# Altium PCB PCB3.PcbDoc
Units mm, origin at the board's own origin, x right, y up, seen from the top; angles counter-clockwise.
Board outline 77.99 x 46.99 mm, 2 copper layers (Top Layer, Bottom Layer); 98 components, 79 nets, 520 pads, 0 vias.
Unrouted connection lines stored in the file: 213.
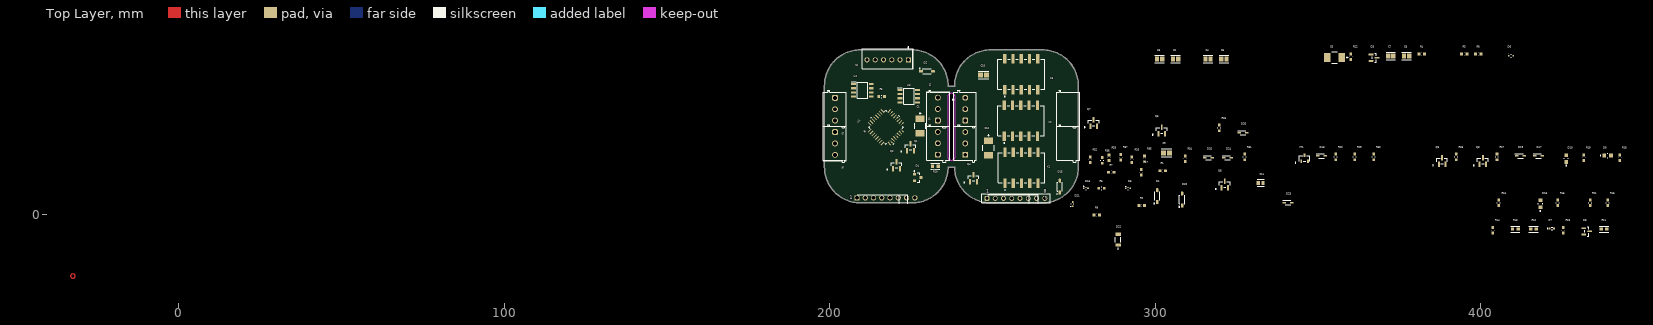
[diagram p0: Top Layer view]
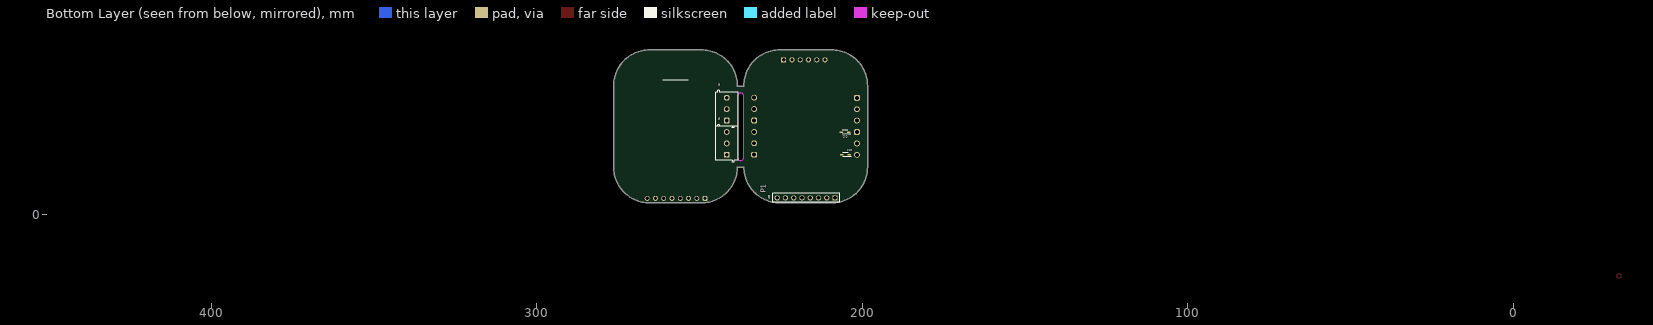
[diagram p1: Bottom Layer view, seen from below]

## Layer stack, top to bottom
Top Solder: solder mask 0.0102, Solder Resist, Dk 3.5
Top Layer: signal copper 0.0356
Dielectric 1: dielectric 0.32, FR-4, Dk 4.8
Bottom Layer: signal copper 0.0356
Bottom Solder: solder mask 0.0102, Solder Resist, Dk 3.5

## Board outline
198.35,14.624 ccw(c209.343,14.624) 209.356,3.631 225.343,3.631 ccw(c225.343,14.624) 236.336,14.624 ccw(c236.33,14.625) 236.336,14.625 cw(c236.343,14.625) 236.343,14.632 238.343,14.632 cw(c238.343,14.625) 238.35,14.625 cw(c238.343,14.625) 238.35,14.625 cw(c238.342,14.624) 238.35,14.624 ccw(c249.343,14.624) 249.356,3.631 265.343,3.631 ccw(c265.343,14.624) 276.336,14.624 ccw(c276.33,14.625) 276.336,14.625 276.334,39.385 cw(c276.343,39.385) 276.334,39.386 276.333,39.865 ccw(c265.343,39.624) 265.351,50.618 cw(c265.345,50.62) 265.345,50.613 249.341,50.613 cw(c249.341,50.62) 249.334,50.618 ccw(c249.345,39.62) 238.35,39.386 cw(c238.343,39.385) 238.343,39.379 236.34,39.379 cw(c236.34,39.385) 236.334,39.385 cw(c236.34,39.385) 236.334,39.386 ccw(c225.352,39.624) 236.336,39.624 ccw(c225.343,39.624) 225.343,50.618 209.339,50.618 cw(c209.344,47.466) 209.347,50.618 209.339,50.618 ccw(c209.343,39.624) 198.35,39.619
cut-out: 236.343,17.626 236.343,36.385 cw(c237.343,36.385) 238.343,36.398 238.343,36.4 238.343,17.625 cw(c237.343,17.625)

## Design rules (kind name [scope] priority, off if disabled: settings)
Clearance [All] p1: gap=0.254 ignorepadtopadclearanceinfootprint=FALSE except(0: Arc-Hole Track-Hole SMDPad-Hole THPad-Hole Via-Hole Fill-Hole Poly-Hole Region-Hole Text-Hole)
ComponentClearance [All] p1: gap=-4.826 collisioncheckmode=3 verticalgap=0.254 showdistances=FALSE
PolygonConnect [All] p1: connectstyle=Relief reliefconductorwidth=0.254 reliefentries=4 polygonreliefangle="90 Angle" airgapwidth=0.254
RoomDefinition Main_board [InComponentClass('Main_board')] p1: confinementstyle=ConfineIn formatcopy=TRUE lockcomponents=FALSE outline 150.496,-19.226 905.887,-19.226 905.887,73.594 150.496,73.594
RoutingCorners [All] p1: cornerstyle=Round minsetback=1.27 maxsetback=1.27
RoutingVias [All] p1: holewidth=0.457 width=0.635 viastyle="Through Hole" minholewidth=0.2 minwidth=0.2 maxholewidth=0.381 maxwidth=0.762
SolderMaskExpansion [All] p1: expansion=0.102 istentingtop=FALSE
UnRoutedNet [All] p1: checkbadconnections=TRUE
Width [All] p1: maxlimit=1 minlimit=0.254 preferedwidth=0.5 minimp=50.000000 maximp=50.000000 favimp=50.000000
27 further rules are at their usual default settings.

## Components (designator, comment, footprint, x,y, rotation, side; value= is the part's Value field where it differs from the comment)
C1 "TAJC476M016RNJ" FP-TAJC-MFG 227.711,27.254 r90 top
C2 "C0805C224K5RACTU" KEMET_C0805C-DN_IPC_B 306.208,47.793 r0 top
C3 "C0805C224K5RACTU" KEMET_C0805C-DN_IPC_B 301.331,47.793 r0 top
C4 "C0805C224K5RACTU" KEMET_C0805C-DN_IPC_B 316.164,47.793 r0 top
C5 "C0805C224K5RACTU" KEMET_C0805C-DN_IPC_B 321.041,47.793 r0 top
C6 "TAJC476M016RNJ" FP-TAJC-MFG 355.026,48.275 r0 top
C7 "C0805C224K5RACTU" KEMET_C0805C-DN_IPC_B 372.298,48.758 r0 top
C8 "C0805C224K5RACTU" KEMET_C0805C-DN_IPC_B 377.175,48.758 r0 top
C9 "0.1мк" KEMET_C0805C-DN_IPC_A 303.44,18.999 r0 top
C10 "0.1мк" KEMET_C0805C-DN_IPC_A 247.167,42.875 r0 top
C11 "1мк" KEMET_C0805C-DN_MFG 332.346,9.728 r0 top
C12 "TAJC476M016RNJ" FP-TAJC-MFG 248.742,20.487 r90 top
D1 "1N4148W-TP" FP-SOD-123-IPC_A 300.569,5.705 r90 top
D2 "1N4148W-TP" FP-SOD-123-IPC_A 229.845,44.018 r0 top
D3 "BAT54С" On_Semiconductor_318-08_IPC_B 367.193,48.199 r0 top
D4 "MMBZ12VALT1G" ONSC-SOT-23-3-318-08_V 226.974,11.405 r0 top
D5 "ESD5Z3.3T1G" ONSC-SOD-523-2-502-01_V 291.603,8.092 r0 top
D6 "ESD5Z3.3T1G" ONSC-SOD-523-2-502-01_V 409.23,48.809 r0 top
D7 "Diode 1N4148" 1N4148WT7 421.803,-4.277 r0 top
D8 "BAT54ALT1G" On_Semiconductor_318-08_IPC_B 432.496,-5.116 r0 top
D9 "150080SS75000" Wurth_Electronics_0_MFG 438.897,18.151 r0 top
D10 "150080SS75000" LED_GREEN 426.197,17.236 r90 top
D11 "Diode 1N4148" SOD2513X120N 205.054,18.39 r0 bottom
D12 "Diode 1N4148" SOD2513X120N 205.232,25.324 r0 bottom
D13 "Diode 1N4148" SOD2513X120N 351.089,18.049 r0 top
D15 "1N4148W-TP" FP-SOD-123-IPC_A 270.662,8.611 r90 top
D16 "ESD5Z3.3T1G" ONSC-SOD-523-2-502-01_V 278.649,8.092 r0 top
D17 "Diode 1N4148" SOD2513X120N 417.714,18.049 r0 top
D18 "150080SS75000" Wurth_Electronics_0_MFG 418.247,3.317 r90 top
D19 "Diode 1N4148" SOD2513X120N 412.126,18.049 r0 top
D20 "1N4148W-TP" FP-SOD-123-IPC_A 308.204,4.674 r90 top
D21 "ESD5Z3.3T1G" ONSC-SOD-523-2-502-01_V 274.599,3.225 r90 top
D22 "BZV55-C5V1,115" FP-SOD80C-MFG 288.544,-7.697 r90 top
D23 "Diode 1N4148" SOD2513X120N 340.766,3.708 r0 top
D24 "Diode 1N4148" SOD2513X120N 322.21,17.49 r0 top
D25 "Diode 1N4148" SOD2513X120N 316.368,17.49 r0 top
D26 "Diode 1N4148" SOD2513X120N 326.949,25.146 r0 top
J1 "691103110003" 691103110003 233.274,21.92 r90 top
J2 "691103110003" 691103110003 233.272,32.436 r90 top
J3 "691103110003" 691103110003 201.5,32.385 r270 top
J4 "61300811821" 61300811821 257.15,5.004 r0 top
J5 "SWR25X-NRTC-S06-ST-BA" Sullins_SWR25X-NRTC-S06-ST-BA_MFG 217.754,47.849 r180 top
J6 "691103110003" 691103110003 201.5,21.869 r270 top
J8 "691103110003" 691103110003 241.503,21.895 r90 bottom
J9 "691103110003" 691103110003 241.505,32.405 r90 bottom
K1 "TQ2SA-L2-5V-Z" FP-TQ2SA-L2-5V-Z-MFG 258.851,14.402 r0 top
K2 "TQ2SA-L2-5V-Z" FP-TQ2SA-L2-5V-Z-MFG 258.674,28.829 r0 top
K3 "TQ2SA-L2-5V-Z" FP-TQ2SA-L2-5V-Z-MFG 258.801,43.104 r0 top
P1 "61300811121" 61300811121 217.221,5.156 r0 bottom
Q1 "BC847C" SOT23-3_ONS-M 224.765,20.701 r0 top
Q2 "BC847C" SOT23-3_ONS-M 220.472,15.164 r0 top
Q3 "BC847C" SOT23-3_ONS-M 400.594,16.474 r0 top
Q4 "BC847C" SOT23-3_ONS-M 244.119,11.188 r0 top
Q5 "BC847C" SOT23-3_ONS-M 301.955,25.894 r0 top
Q6 "BC847C" SOT23-3_ONS-M 388.072,16.474 r0 top
Q7 "BC847C" SOT23-3_ONS-M 281.051,28.155 r0 top
Q8 "BC847C" SOT23-3_ONS-M 321.31,9.232 r0 top
R1 "100K" FP-RC0603-0_55-MFG 302.299,13.538 r0 top
R2 "100K" FP-RC0603-0_55-MFG 295.783,2.819 r0 top
R3 "470" FP-RC0603-0_55-MFG 394.854,49.342 r0 top
R4 "10K" FP-RC0603-0_55-MFG 381.773,49.342 r0 top
R5 "10K" FP-RC0603-0_55-MFG 215.875,36.297 r0 top
R6 "100K" FP-RC0603-0_55-MFG 283.449,8.143 r0 top
R7 "100K" FP-RC0603-0_55-MFG 286.399,13.03 r0 top
R8 "1M" FP-RC0603-0_55-MFG 399.172,49.342 r0 top
R9 "1M" FP-RC0603-0_55-MFG 281.94,-0.102 r0 top
R10 "620K" FP-RC0603-0_55-IPC_A 232.41,14.834 r0 top
R11 "620K" FP-RC0603-0_55-IPC_A 437.805,-4.43 r0 top
R12 "100K" FP-RC0603-0_55-IPC_A 416.164,-4.43 r0 top
R13 "100K" FP-RC0603-0_55-IPC_A 410.576,-4.43 r0 top
R14 "30K" FP-RC0603-0_55-MFG 403.617,-4.836 r90 top
R15 "1K5" FP-RC0603-0_55-MFG 423.606,3.597 r90 top
R16 "10K" FP-RC0603-0_55-MFG 438.897,3.597 r90 top
R17 "1K" FP-RC0603-0_55-MFG 295.717,13.071 r90 top
R18 "200" FP-RC0603-0_55-MFG 442.606,17.516 r90 top
R19 "200" FP-RC0603-0_55-MFG 431.557,17.516 r90 top
R20 "10K" FP-RC0603-0_55-MFG 355.357,17.719 r90 top
R21 "10K" FP-RC0603-0_55-MFG 433.563,3.597 r90 top
R22 "1M" FP-RC0603-0_55-MFG 359.979,48.478 r90 top
R23 "100K" FP-RC0603-0_55-MFG 425.283,-4.836 r90 top
R24 "100" FP-RC0603-0_55-MFG 405.496,3.597 r90 top
R25 "10K" FP-RC0603-0_55-MFG 319.608,26.631 r90 top
R26 "10K" FP-RC0603-0_55-MFG 292.786,16.84 r90 top
R27 "10K" FP-RC0603-0_55-MFG 404.937,17.719 r90 top
R28 "10K" FP-RC0603-0_55-MFG 392.39,17.719 r90 top
R29 "100K" FP-RC0603-0_55-MFG 361.199,17.719 r90 top
R30 "100K" FP-RC0603-0_55-MFG 367.041,17.719 r90 top
R31 "1K" FP-RC0603-0_55-MFG 327.467,17.719 r90 top
R32 "100K" FP-RC0603-0_55-MFG 279.959,16.852 r90 top
R33 "100K" FP-RC0603-0_55-MFG 285.75,17.487 r90 top
R34 "10K" FP-RC0603-0_55-MFG 309.179,17.16 r90 top
R35 "10K" FP-RC0603-0_55-MFG 296.657,17.16 r90 top
R36 "100K" FP-RC0603-0_55-MFG 283.718,16.649 r90 top
R37 "100K" FP-RC0603-0_55-MFG 289.306,17.614 r90 top
U1 "STM32L031K6T6" LQFP32_7X7X1P4 217.221,26.848 r45 top
U2 "LP2951CM-3.0/NOPB" SOIC127P600X175-8N 210.007,38.202 r0 top
U3 "IRF9362" SOIC127P600X175-8N 224.257,36.398 r0 top
VT1 "BC847" SOT23-3_ONS-L 345.832,17.287 r0 top

## Footprints (in the part's own frame and the unit in brackets; to place one, negate y for a bottom-side part, rotate by r counter-clockwise, add the part's x,y. Pads: shape width x height; smd on the part's side, far side on the other; paste and mask are expansions set on the pad)
1N4148WT7 [mm]
  rect 0.6x0.7 smd: 1(-0.7,0) 2(0.7,0)
  silkscreen extent -1.5,-0.4 0.2,0.4, body extent -0.85,-0.45 0.85,0.45, height 0.7
61300811121 [mm] "Pin Header, pitch 2.54 mm, THT, Vertical, single row, 8p"
  rect 1.6x1.6 hole 1.1: 1(-8.89,0)
  round 1.6 hole 1.1: 2(-6.35,0) 3(-3.81,0) 4(-1.27,0) 5(1.27,0) 6(3.81,0) 7(6.35,0) 8(8.89,0)
  silkscreen extent -10.31,-1.35 10.31,1.35, body extent -10.16,-1.27 10.16,1.27, height 8.57
61300811821 [mm] "Socket Header, Pitch 2.54 mm, THT, Vertical, single row, 8p"
  rrect50% 1.52x1.52 hole 1.02: 1(-8.89,0)
  round 1.52 hole 1.02: 2(-6.35,0) 3(-3.81,0) 4(-1.27,0) 5(1.27,0) 6(3.81,0) 7(6.35,0) 8(8.89,0)
  silkscreen extent -10.54,-1.35 10.54,1.35, body extent -10.41,-1.25 10.41,1.25, height 8.55
691103110003 [mm] "3,50mm - modular - blue - Horizontal wire entry - Pressure clamp - 8,4mm height - 03p"
  rrect50% 1.8x1.8 hole 1.2: 1(-3.5,0.1)
  round 1.8 hole 1.2: 2(0,0.1) 3(3.5,0.1)
  silkscreen extent -5.75,-3.5 5.75,3.5, body extent -5.75,-3.5 5.75,3.5, height 8.45
FP-RC0603-0_55-IPC_A [mm]
  rect 1.059x1.012 smd paste+0 mask+0: 1(-0.877,0) 2(0.877,0)
  silkscreen extent -1.41,-0.91 1.41,0.91, body extent -1.91,-1.01 1.91,1.01, height 0.25
FP-RC0603-0_55-MFG [mm]
  rect 0.9x0.8 smd paste+0 mask+0: 1(-0.85,0) 2(0.85,0)
  silkscreen extent -0.03,-0.45 0.03,0.45, body extent -1.4,-0.55 1.4,0.55, height 0.25
FP-SOD80C-MFG [mm]
  rect 1x1.7 smd paste-1000 mask+0: 1(-1.65,0) 2(1.65,0)
  silkscreen extent -2.9,-0.8 0.77,0.8, body extent -2.27,-1.12 2.27,1.12, height 0.25
FP-SOD-123-IPC_A [mm]
  rect 1.308x0.762 smd paste+0 mask+0: 1(-1.825,0)
  rrect100% 1.308x0.762 smd paste+0 mask+0: 2(1.825,0)
  silkscreen extent -2.39,-0.8 1.35,1.01, body extent -2.98,-1.3 2.98,1.3, height 0.25
FP-TAJC-MFG [mm]
  rect 2x2.8 smd paste+0 mask+0: 1(-2.25,0) 2(2.25,0)
  silkscreen extent -0.87,-1.7 4.23,1.7, body extent -3.35,-1.8 3.35,1.8, height 0.25
FP-TQ2SA-L2-5V-Z-MFG [mm]
  rect 1x2.94 smd paste+0 mask+0: 1(-5.08,-4.78) 2(-2.54,-4.78) 3(0,-4.78) 4(2.54,-4.78) 5(5.08,-4.78) 6(5.08,4.78) 7(2.54,4.78) 8(0,4.78) 9(-2.54,4.78) 10(-5.08,4.78)
  silkscreen extent -7.15,-6.93 7.15,4.65, body extent -7.25,-6.35 7.25,6.35, height 0.25
KEMET_C0805C-DN_IPC_A [mm]
  rect 1.505x1.556 smd paste+0 mask+0: 1(-0.901,0) 2(0.901,0)
  silkscreen extent -1.65,-1.18 1.65,1.18, body extent -2.15,-1.28 2.15,1.28, height 0.25
KEMET_C0805C-DN_IPC_B [mm]
  rect 1.305x1.456 smd paste+0 mask+0: 1(-0.801,0) 2(0.801,0)
  silkscreen extent -1.45,-1.13 1.45,1.13, body extent -1.7,-0.98 1.7,0.98, height 0.25
KEMET_C0805C-DN_MFG [mm]
  rect 0.95x1.35 smd paste+0 mask+0: 1(-0.75,0) 2(0.75,0)
  silkscreen extent -1.1,-1.07 1.1,1.07, body extent -1.4,-0.85 1.4,0.85, height 0.25
LED_GREEN [mm]
  rect 1.1x1.2 smd paste+0 mask+0: 1(-1.05,0) 2(1.05,0)
  silkscreen extent -2.27,-0.67 0.13,0.67, body extent -1,-0.63 1,0.63, height 0.8
LQFP32_7X7X1P4 [mm]
  rect 1.353x0.304 smd paste+0 mask+0: 1(-4.271,2.8) 2(-4.271,2) 3(-4.271,1.2) 4(-4.271,0.4) 5(-4.271,-0.4) 6(-4.271,-1.2) 7(-4.271,-2) 8(-4.271,-2.8) 17(4.271,-2.8) 18(4.271,-2) 19(4.271,-1.2) 20(4.271,-0.4) 21(4.271,0.4) 22(4.271,1.2) 23(4.271,2) 24(4.271,2.8)
  rect 0.304x1.353 smd paste+0 mask+0: 9(-2.8,-4.271) 10(-2,-4.271) 11(-1.2,-4.271) 12(-0.4,-4.271) 13(0.4,-4.271) 14(1.2,-4.271) 15(2,-4.271) 16(2.8,-4.271) 25(2.8,4.271) 26(2,4.271) 27(1.2,4.271) 28(0.4,4.271) 29(-0.4,4.271) 30(-1.2,4.271) 31(-2,4.271) 32(-2.8,4.271)
  silkscreen extent -3.72,-5.46 5.46,5.46, body extent -4.6,-4.6 4.6,4.6, height 1.6
On_Semiconductor_318-08_IPC_B [mm]
  rect 1.524x0.578 smd paste+0 mask+0: 1(-0.91,0.95)
  rrect100% 1.524x0.578 smd paste+0 mask+0: 2(-0.91,-0.95) 3(0.91,0)
  silkscreen extent -0.65,-1.45 0.65,1.45, body extent -1.92,-1.7 1.92,1.7, height 0.25
ONSC-SOD-523-2-502-01_V [mm] "SOD, 2-Leads, Body 1.2x0.8mm"
  rect 0.48x0.4 smd: 1(-0.66,0) 2(0.66,0)
  silkscreen extent -0.75,-0.4 0.07,0.65, body extent -0.6,-0.4 0.6,0.4, height 0.7
ONSC-SOT-23-3-318-08_V [mm] "SOT23, 3-Leads, Body 2.92x1.3mm, Pitch 0.95mm"
  rect 0.9x0.8 smd: 1(-1,0.95) 2(-1,-0.95) 3(1,0)
  silkscreen extent -1.12,-1.46 0.65,2.02, body extent -0.65,-1.46 0.65,1.46, height 1.11
SOD2513X120N [mm]
  rect 1.075x0.5 smd: 1(-1.162,0) 2(1.162,0)
  silkscreen extent -1.7,-0.65 0.85,0.65, body extent -1.25,-0.65 1.25,0.65, height 1.2
SOIC127P600X175-8N [mm]
  rect 1.525x0.65 smd: 1(-2.712,1.905) 2(-2.712,0.635) 3(-2.712,-0.635) 4(-2.712,-1.905) 5(2.712,-1.905) 6(2.712,-0.635) 7(2.712,0.635) 8(2.712,1.905)
  silkscreen extent -3.47,-2.45 1.6,2.58, body extent -3,-2.45 3,2.45, height 1.75
SOT23-3_ONS-L [mil]
  rect 20.79x42.75 smd paste+0 mask+0: 1(-40,-36.53) 2(40,-36.53) 3(0,36.53)
  silkscreen extent -115,-57 65,32, body extent -60,-52 60,52, height 44
SOT23-3_ONS-M [mil]
  rect 23.94x66.37 smd paste+0 mask+0: 1(-40,-40.47) 2(40,-40.47) 3(0,40.47)
  silkscreen extent -115,-57 65,32, body extent -60,-52 60,52, height 44
Sullins_SWR25X-NRTC-S06-ST-BA_MFG [mm]
  rect 1.55x1.55 hole 1 paste-1000 mask+0: 1(-6.35,0.3)
  round 1.55 hole 1 paste-1000 mask+0: 2(-3.81,0.3) 3(-1.27,0.3) 4(1.27,0.3) 5(3.81,0.3) 6(6.35,0.3)
  silkscreen extent -7.8,-3.67 7.8,3.05, body extent -7.9,-3.15 7.9,3.15, height 0.25
Wurth_Electronics_0_MFG [mm]
  rect 1.1x1.2 smd paste+0 mask+0: 1(-1.05,0) 2(1.05,0)
  silkscreen extent -2.27,-0.67 0.13,0.67, body extent -1.7,-0.77 1.7,0.77, height 0.25

## Part data
C1 C6 C12: library part CMP-04424-000193-1, "47uF 16V  ±20% 500mΩ 2312  SMD Tantalum Capacitor", Capacitance=47uF, Case Code (Imperial)=2312, Case Code (Metric)=6032, Case/Package=6032-28, ESR (Equivalent Series Resistance)=500mR, Leakage Current=7.5uA, Max Operating Temperature=125°C, Min Operating Temperature=-55°C, Package Quantity=1, Tolerance=20%, Voltage Rating=16V, Construction=Flat, Depth=3.2mm, Dissipation Factor=6%, Features="General Purpose", Height=2.8mm, Height - Seated (Max)=0.11inch, Lead Free="Lead Free", Length=6mm, Mount="Surface Mount", Number of Pins=2, Packaging="Tape and Reel", Polarity=Polar, Radiation Hardening=No, REACH SVHC="No SVHC", RoHS Compliant=Yes, Series=TAJ, Termination=SMD/SMT, Voltage Rating (DC)=16V, Width=3.2mm
C2 C3 C7 C8: "0.1uF"
C9 C10: library part C0805, Dielectric=X7R, Package=KEMET_C0805C-DN_IPC_A, Voltage=50, ComponentDescription="Конденсатор керамический SMD, KEMET_C0805C-DN_IPC_A, 50В, 0.1мк, X7R", ComponentType="Конденсатор керамический SMD"
C11: library part C0805, Dielectric=X7R, Package=KEMET_C0805C-DN_MFG, Voltage=50, ComponentDescription="Конденсатор керамический SMD, KEMET_C0805C-DN_MFG, 50В, 1мк, X7R", ComponentType="Конденсатор керамический SMD"
D1 D2 D15 D20: library part CMP-2000-04993-2, "DIODE GEN PURP 100V 150MA SOD123", Average Rectified Current=150mA, Capacitance=4pF, Forward Voltage=1V, Max Forward Surge Current (Ifsm)=1A, Max Operating Temperature=150°C, Max Repetitive Reverse Voltage (Vrrm)=100V, Max Reverse Leakage Current=5uA, Max Surge Current=2A, Min Operating Temperature=-65°C, Package Quantity=3000, Power Dissipation=400mW, Current Rating=150mA, Element Configuration=Single, Forward Current=150mA, Height=1.2mm, Lead Free="Lead Free", Length=2.85mm, Max Reverse Voltage (DC)=100V, Mount="Surface Mount", Number of Pins=2, Output Current=150mA, Packaging="Tape and Reel", Peak Non-Repetitive Surge Current=2A, Polarity=Standard, Radiation Hardening=No, Recovery Time=4ns, Reverse Recovery Time=4ns, Voltage Rating (DC)=100V, Width=1.8mm
D3: library part BAT54ALT1G
D4: library part CMP-1061-00649-1, "40 W Peak Power Zener Transient Voltage Suppressor, Dual Common Anode Zeners for ESD Protection, 3-Pin SOT-23, Pb-Free, Tape and Reel", Manufacturer="On Semiconductor", ComponentLink1Description="Manufacturer URL", ComponentLink1URL=http://www.onsemi.com/, ComponentLink2Description=Datasheet, ComponentLink2URL=http://www.onsemi.com/pub_link/Collateral/MMBZ5V6ALT1-D.PDF, ComponentLink3Description="Package Specification", ComponentLink3URL=http://www.onsemi.cn/pub_link/Collateral/318-08.PDF, DatasheetVersion="Rev. 13", Direction=Unidirectional, IR Max (uA)=0.2, Mounting Technology="Surface Mount", PackageDescription="3-Pin Small Outline Transistor, Body 2.92 x 1.3 mm, Pitch 0.95 mm", PackageReference=SOT-23-3-318-08, PackageVersion="Rev. AP, 11/2009", Packing="Tape and Reel", PartNumber=MMBZ12VALT1G, PPK Max (W)=40, RoHS=Pb-Free, V(BR) Typ (V)=12
D5 D6 D16 D21: library part CMP-1063-00098-1, "Transient Voltage Suppressor, Micro-Packaged Diode for ESD Protection, 2-Pin SOD-523, Pb-Free, Tape and Reel", Manufacturer="On Semiconductor", ComponentLink1Description="Manufacturer URL", ComponentLink1URL=http://www.onsemi.com/, ComponentLink2Description=Datasheet, ComponentLink2URL=http://www.onsemi.cn/pub_link/Collateral/ESD5Z2.5T1-D.PDF, ComponentLink3Description="Package Specification", ComponentLink3URL=http://www.onsemi.com/pub_link/Collateral/502-01.PDF, DatasheetVersion="Rev. 10", Direction=Unidirectional, IR Max (uA)=0.05, Mounting Technology="Surface Mount", Number of Lines=1, PackageDescription="2-Pin SOD, Body 1.2 x 0.8 mm", PackageReference=SOD-523-2-502-01, PackageVersion="Rev. E, 09/2010", Packing="Tape and Reel", PartNumber=ESD5Z3.3T1G, PPK Max (W)=158, RoHS=Pb-Free, V(BR) Min (V)=5, VRWM Max (V)=3.3
D7 D11 D12 D13 D17 D19 D23 D24 D25 D26: "High Conductance Fast Diode", Code_JEDEC=DO-204-AH, ComponentLink1Description="Manufacturer Link", ComponentLink1URL=http://www.fairchildsemi.com/, ComponentLink2Description=Datasheet, ComponentLink2URL=http://www.fairchildsemi.com/ds/1N%2F1N4148.pdf, DatasheetVersion=1997, LatestRevisionDate=17-Jul-2002, LatestRevisionNote="Re-released for DXP Platform.", PackageDescription="Diode, Axial; Body 3.8 x 1.9 mm (LxDia. max), Lead Dia. 0.53 mm (max)", PackageReference=DO-35, Published=8-Jun-2000, Publisher="Altium Limited"
D22: library part CMP-14400-000027-1, "DIODE ZENER 5.1V 500MW LLDS", RoHS Compliant=Yes
J1 J2 J3 J6 J8 J9: "WR-TBL Series 1031 Horizontal Entry Modular, Through Hole, pitch 3.5mm, 3p", Manufacturer="Wurth Elektronik", Operating Temperature Max=105°C, Operating Temperature Min=-40°C, Rated Current=10A, Working Voltage=125V, Application="Pressure Clamp", Category="Terminal Blocks", ComponentLink1Description="Manufacturer Link", ComponentLink1URL=https://www.we-online.com/redexpert/article/691103110003?ad, ComponentLink2Description=Datasheet, ComponentLink2URL=https://www.we-online.com/redexpert/spec/691103110003?ad, Manufacturer Part Number=691103110003, Match Code=WR-TBL, Modularity=Yes, Mount="Through Hole", Orientation=Horizontal, Packaging=Box, PCB/Cable/Panel=PCB, Pin Number=3, Pitch=3.5mm
J4: "WR-PHD Socket Header, THT, Vertical, pitch 2.54mm, 1 Row, 8P", Contact Resistance=20mΩ, Manufacturer="Wurth Elektronik", Operating Temperature Max=125°C, Operating Temperature Min=-40°C, Rated Current=3A, Withstanding Voltage=500V, Working Voltage=250V, Category="Board-to-Board Connectors", ComponentLink1Description="Website Link", ComponentLink1URL=https://www.we-online.com/redexpert/article/61300811821?ad, ComponentLink2Description="Datasheet Link", ComponentLink2URL=https://www.we-online.com/redexpert/spec/61300811821?ad, Gender="Socket Header", Manufacturer Part Number=61300811821, Match Code=WR-PHD, Mount="Through Hole", Number of Pins=8, Number of Rows=1, Orientation=Vertical, Packaging=Tray, Pitch=2.54mm
K1 K2 K3: library part CMP-05607-000158-1, "RELAY TELECOM DPDT 2A 5VDC", Coil Current=28.1mA, Coil Power=140mW, Coil Resistance=178R, Coil Voltage (DC)=5V, Contact Current Rating=2A, Max Operating Temperature=85°C, Max Voltage Rating (AC)=125V, Max Voltage Rating (DC)=220V, Min Operating Temperature=-40°C, Package Quantity=500, Coil Type="Latching, Dual Coil", Contact Material=Gold, Depth=11.5mm, Insertion Loss=0.8dB, Lead Free="Lead Free", Length=14mm, Max Current Rating=2A, Mount="Surface Mount", Number of Pins=10, Operate Time=4ms, Packaging="Tape and Reel", Power Consumption=140mW, Radiation Hardening=No, Relay Type=Telecom, Release Time=4ms, RoHS Compliant=Yes, Series=TQ-SMD, Termination="Gull Wing", Throw Configuration=DPDT, Voltage Rating (AC)=125V, Voltage Rating (DC)=220V, Weight=2g
P1: library part CMP-1502-01076-1, "THT Vertical Pin Header WR-PHD, Pitch 2.54 mm, Single Row, 8 pins", Contact Resistance=20mOhm, Manufacturer="Wurth Elektronik", Operating Temperature=-40to105degC, Rated Current=3A, Withstanding Voltage=500VAC, Working Voltage=250VAC, Datasheet URL=https://katalog.we-online.de/em/datasheet/6130xx11121.pdf, Gender=Male, Manufacturer URL=http://www.we-online.de, Mounting Technology=THT, Orientation=Vertical, Package Reference=61300811121, Packaging=Bag, Part Number=61300811121, Pin Number=8, Pitch=2.54mm, Publisher=WurthElektronik, Row Number=Single
Q1 Q2 Q3 Q4 Q5 Q6 Q7 Q8: "NPN Silicon AF Transistor, 45 V VCEO, 100 mA IC, SOT23, Reel, Green", Manufacturer=Infineon, ComponentLink1Description="Manufacturer URL", ComponentLink1URL=http://www.infineon.com/, ComponentLink2Description=Datasheet, ComponentLink2URL=http://www.infineon.com/dgdl/bc847series_bc848series_bc849series_bc850series.pdf?folderId=db3a304314dca389011541d30fa21656&fileId=db3a304314dca389011541d4630a1657, ComponentLink3Description="Package Specification", ComponentLink3URL=http://www.infineon.com/dgdl/SOT23-Package_Overview.pdf?folderId=db3a30431936bc4b0119532290053c66&fileId=db3a30431936bc4b0119533468123c85, fT (typ)="250Â MHz", Green=TRUE, IBM (max)="200Â mA", IC (max)="100Â mA", ICBO (max)="15Â nA", ICM (max)="200Â mA", Mounting Technology="Surface Mount", PackageDescription="3-Pin Small Outline Transistor Package, 1.3 x 2.9 mm Body, 0.95 mm Pitch", PackageReference=SOT23, PackageVersion=Apr-08, Packing=Reel, PartNumber=BC847C, Polarity=NPN, Ptot (max)="330Â mW", VCBO (max)="50Â V", VCEO (max)="45Â V", VEBO (max)="6Â V"
R1 R2 R3 R4 R5 R6 R7 R8 R9 R10 R11 R12 R13 R14 R15 R16 R17 R18 R19 R20 R21 R22 R23 R24 R25 R26 R27 R28 R29 R30 R31 R32 R33 R34 R35 R36 R37: library part CMP-2000-06932-2, "RES 20K OHM 1% 1/10W 0603", Case Code (Imperial)=0603, Case Code (Metric)=1608, Max Operating Temperature=155°C, Max Power Dissipation=100mW, Min Operating Temperature=-55°C, Package Quantity=1, Resistance=20kR, Resistance Tolerance=1%, Resistor Type="Thick Film", Temperature Coefficient=100ppm/°C, Voltage Rating=50V, Case/Package=0603, Construction=Rectangular, Depth=0.8mm, Features="Moisture Resistant", Height=0.022inch, Lead Free="Lead Free", Length=0.063inch, Military Standard=Not, Number of Pins=2, Number of Terminations=2, Packaging="Tape and Reel", Power Rating=100mW, REACH SVHC="No SVHC", RoHS Compliant=Yes, Series=RC, Size Code=0603, Technology="THICK FILM", Termination=SMD/SMT, Tolerance=1%, Voltage Rating (DC)=50V, Width=0.031inch
U1: "No Description Available", Mfr_Name=STMicroelectronics, Copyright="Copyright (C) 2022 Ultra Librarian. All rights reserved.", Manufacturer_Part_Number=STM32L031K6T6, RefDes=RefDes, Type=DEV
U2: "Series of Adjustable Micropower Voltage Regulators, 8-pin Narrow SOIC, Pb-Free", Manufacturer="National Semiconductor", PackageTopMarking=NSZXTT*2951C*M30DD, PowerWise=N, Code_IPC=SOIC127P600-8, Code_JEDEC=MS-012-AA, CompType="LDO IC", DatasheetVersion=Jun-2009, PackageDescription="SOIC Narrow, 4.9 x 3.9 x 1.45mm, 8 Lead, 1.27mm Pitch", PackageReference=M08A, PackageVersion="revM, May-2009", PartNumber=LP2951CM-3.0/NOPB, PinCount=8, RoHS=Y
VT1: library part BCP54, Package=SOT23-3_ONS-L, ChannelType=NPN, ComponentDescription="Транзистор биполярный, NPN, BC847, SOT23-3_ONS-L", ComponentType="Транзистор биполярный"

## Free pads (board coordinates)
  round 0.1 on Top Overlay: 1(197.988,16.665) 1(197.988,16.665) 1(197.988,27.165) 1(197.988,27.165) 1(197.988,27.165) 1(197.988,27.165) 1(197.988,37.665) 1(197.988,37.665) 1(199.21,27.665) 1(199.21,27.665) 1(199.21,38.165) 1(199.21,38.165) 1(199.289,27.165) 1(199.289,27.165) 1(199.289,37.665) 1(199.289,37.665) 1(199.939,27.165) 1(199.939,37.665) 1(199.939,27.164) 1(199.939,37.664) 1(200.009,27.665) 1(200.009,27.665) 1(200.009,38.165) 1(200.009,38.165) 1(203.839,16.165) 1(203.839,26.665) 1(203.839,16.165) 1(203.839,26.665) 1(203.889,16.665) 1(203.889,16.665) 1(203.889,27.165) 1(203.889,27.165) 1(204.339,16.665) 1(204.339,16.665) 1(204.339,27.165) 1(204.339,27.165) 1(204.388,16.165) 1(204.388,26.665) 1(204.389,16.165) 1(204.389,26.665) 1(204.989,16.665) 1(204.989,16.665) 1(204.989,27.165) 1(204.989,27.165) 1(204.989,27.165) 1(204.989,27.165) 1(204.989,37.665) 1(204.989,37.665) 1(208.468,3.356) 1(208.468,3.356) 1(208.468,6.046) 1(208.468,6.046) 1(209.938,44.814) 1(209.938,44.814) 1(221.318,3.356) 1(221.318,6.046) 1(224.008,3.356) 1(224.008,3.356) 1(224.008,6.046) 1(224.008,6.046) 1(225.538,44.814) 1(225.538,44.814) 1(229.775,16.652) 1(229.775,16.652) 1(229.775,27.152) 1(229.775,27.152) 1(229.775,27.152) 1(229.775,27.152) 1(229.775,37.652) 1(229.775,37.652) 1(230.375,27.652) 1(230.375,38.152) 1(230.376,27.652) 1(230.376,38.152) 1(230.425,27.152) 1(230.425,27.152) 1(230.425,37.652) 1(230.425,37.652) 1(230.875,27.152) 1(230.875,27.152) 1(230.875,37.652) 1(230.875,37.652) 1(230.924,27.652) 1(230.924,38.152) 1(230.925,27.652) 1(230.925,38.152) 1(234.755,16.152) 1(234.755,16.152) 1(234.755,26.652) 1(234.755,26.652) 1(234.824,16.654) 1(234.824,27.154) 1(234.825,16.652) 1(234.825,27.152) 1(235.475,16.652) 1(235.475,16.652) 1(235.475,27.152) 1(235.475,27.152) 1(235.553,16.152) 1(235.553,16.152) 1(235.553,26.652) 1(235.553,26.652) 1(236.775,27.152) 1(236.775,27.152) 1(236.775,37.652) 1(236.775,37.652) 1(236.775,16.652) 1(236.775,16.652) 1(236.775,27.152) 1(236.775,27.152) 1(237.99,16.661) 1(237.99,16.661) 1(237.99,27.161) 1(237.99,27.161) 1(237.99,27.161) 1(237.99,27.161) 1(237.99,37.661) 1(237.99,37.661) 1(239.212,27.661) 1(239.212,27.661) 1(239.212,38.161) 1(239.212,38.161) 1(239.29,27.161) 1(239.29,27.161) 1(239.29,37.661) 1(239.29,37.661) 1(239.94,27.161) 1(239.94,37.661) 1(239.941,27.159) 1(239.941,37.659) 1(240.01,27.661) 1(240.01,27.661) 1(240.01,38.161) 1(240.01,38.161) 1(243.84,16.161) 1(243.84,26.661) 1(243.841,16.161) 1(243.841,26.661) 1(243.89,16.661) 1(243.89,16.661) 1(243.89,27.161) 1(243.89,27.161) 1(244.34,16.661) 1(244.34,16.661) 1(244.34,27.161) 1(244.34,27.161) 1(244.389,16.161) 1(244.389,26.661) 1(244.39,16.161) 1(244.39,26.661) 1(244.99,16.661) 1(244.99,16.661) 1(244.99,27.161) 1(244.99,27.161) 1(244.99,27.161) 1(244.99,27.161) 1(244.99,37.661) 1(244.99,37.661) 1(248.468,6.046) 1(248.468,6.046) 1(261.318,3.356) 1(261.318,6.046) 1(264.008,3.356) 1(264.008,3.356) 1(264.008,6.046) 1(264.008,6.046) 1(269.775,16.652) 1(269.775,16.652) 1(269.775,27.152) 1(269.775,27.152) 1(269.775,27.152) 1(269.775,27.152) 1(269.775,37.652) 1(269.775,37.652) 1(270.375,27.652) 1(270.375,38.152) 1(270.376,27.652) 1(270.376,38.152) 1(270.425,27.152) 1(270.425,27.152) 1(270.425,37.652) 1(270.425,37.652) 1(270.875,27.152) 1(270.875,27.152) 1(270.875,37.652) 1(270.875,37.652) 1(270.924,27.652) 1(270.924,38.152) 1(270.925,27.652) 1(270.925,38.152) 1(274.755,16.152) 1(274.755,16.152) 1(274.755,26.652) 1(274.755,26.652) 1(274.824,16.654) 1(274.824,27.154) 1(274.825,16.652) 1(274.825,27.152) 1(275.475,16.652) 1(275.475,16.652) 1(275.475,27.152) 1(275.475,27.152) 1(275.553,16.152) 1(275.553,16.152) 1(275.553,26.652) 1(275.553,26.652) 1(276.775,27.152) 1(276.775,27.152) 1(276.775,37.652) 1(276.775,37.652) 1(276.775,16.652) 1(276.775,16.652) 1(276.775,27.152) 1(276.775,27.152)
  round 0.125 on Top Overlay: 1(224.608,4.576) 1(224.608,4.826) 1(264.608,4.576) 1(264.608,4.826)
  round 0.25 on Top Overlay: 1(224.608,4.701) 1(264.608,4.701)
  round 0.006 on Top Overlay: 1(237.902,35.364) 1(237.902,27.126) 1(237.902,35.364) 1(277.902,27.126)

## Nets (pads, with @x,y where several pads share a name; then routed paths per layer and width w, separated by ;. In a path a pad name is that pad's centre, name@x,y a point inside that pad or via, vN(x,y) a via of type N, cw(c..) or ccw(c..) an arc to the next point about the centre after c; other vN are vias at no path point)
GND: C1.1 C2.2 C3.2 C4.2 C5.2 C6.1 C7.2 C8.2 D4.3 D5.2 D6.2 D9.1 D10.1 D16.2 D21.2 J1.2 J2.2 J3.2 J5.6 J6.2 P1.1 Q1.2 R12.1 R13.1 R16.1 R20.2 R23.1 R24.1 U1.16 U1.32 U2.3 U2.4
GND_II: C9.2 C10.2 C11.2 C12.1 D22.2 J4.1 Q3.2 Q4.2 Q5.2 Q6.2 Q7.2 Q8.2 R29.1 R30.1 R32.1 R33.1 R36.1 R37.1
NetC1_2: C1.2 C4.1 C5.1 D1.1 D2.1 D15.1 D20.1 J5.1 R1.2 R2.2 R4.2 R6.2 R7.2 U1.1 U1.5 U1.17 U2.1 U2.2
NetC2_1: C2.1 D1.2 D5.1 J1.3 R1.1 U1.10
NetC3_1: C3.1 D2.2 D6.1 J2.3 R2.1 U1.6
NetC6_2: C6.2 D3.2 R3.1
NetC7_1: C7.1 D15.2 D16.1 J1.1 R6.1 U1.11
NetC8_1: C8.1 D20.2 D21.1 J2.1 R7.1 U1.7
NetC9_1: C9.1 J4.2 R31.1 VT1.2
NetC10_1: C10.1 C11.1 C12.2 D13.1 VT1.3
NetD3_1: D3.1
NetD3_3: D3.3 D8.3 R15.2 R21.2 R22.2
NetD4_1: D4.1 D8.1 J3.1 R10.2 U3.7 U3.8
NetD4_2: D4.2 D8.2 J3.3 R11.2 U3.5 U3.6
NetD7_1: D7.1 R9.1
NetD7_2: D7.2 Q1.3
NetD9_2: D9.2 R18.1
NetD10_2: D10.2 R19.1
NetD11_1: D11.1 J6.3
NetD11_2: D11.2 D12.2 P1.2
NetD12_1: D12.1 J6.1
NetD13_2: D13.2 D17.2 D19.2 D23.2 D24.2 D25.2 D26.2 K1.1 K1.10 K2.1 K2.10 K3.1 K3.10
NetD17_1: D17.1 K1.6 Q3.3
NetD18_1: D18.1 Q2.3 R15.1
NetD18_2: D18.2 R21.1
NetD19_1: D19.1 K1.5 Q6.3
NetD22_1: D22.1 R31.2 VT1.1
NetD23_1: D23.1 K2.5 Q4.3
NetD24_1: D24.1 K2.6 Q5.3
NetD25_1: D25.1 K3.5 Q7.3
NetD26_1: D26.1 K3.6 Q8.3
NetJ4_3: J4.3 R35.2
NetJ4_4: J4.4 R34.1
NetJ4_5: J4.5 R26.2
NetJ4_6: J4.6 R25.1
NetJ4_7: J4.7 R28.2
NetJ4_8: J4.8 R27.1
NetJ5_2: J5.2 U1.23
NetJ5_3: J5.3 U1.24
NetJ5_4: J5.4 U1.8
NetJ5_5: J5.5 U1.9
NetJ8_1: J8.1 K1.4 K1.7
NetJ8_2: J8.2 K1.3 K1.8
NetJ8_3: J8.3 K2.3 K2.8
NetJ9_1: J9.1 K2.4 K2.7
NetJ9_2: J9.2 K3.3 K3.8
NetJ9_3: J9.3 K3.4 K3.7
NetK1_2: K1.2 K1.9
NetK2_2: K2.2 K2.9
NetK3_2: K3.2 K3.9
NetP1_3: P1.3 U1.25
NetP1_4: P1.4 U1.30
NetP1_5: P1.5 U1.29
NetP1_6: P1.6 U1.28
NetP1_7: P1.7 U1.27
NetP1_8: P1.8 U1.26
NetQ1_1: Q1.1 R14.1 R16.2
NetQ2_1: Q2.1 R17.2
NetQ2_2: Q2.2 R24.2
NetQ3_1: Q3.1 R28.1 R30.2
NetQ4_1: Q4.1 R25.2 R32.2
NetQ5_1: Q5.1 R26.1 R33.2
NetQ6_1: Q6.1 R27.2 R29.2
NetQ7_1: Q7.1 R34.2 R36.2
NetQ8_1: Q8.1 R35.1 R37.2
NetR3_2: R3.2 U2.8
NetR4_1: R4.1 R5.2 U1.4
NetR5_1: R5.1 U2.5
NetR8_1: R8.1 R9.2 U3.1 U3.3
NetR8_2: R8.2 U3.2 U3.4
NetR10_1: R10.1 R12.2 U1.20
NetR11_1: R11.1 R13.2 U1.18
NetR14_2: R14.2 U1.12
NetR17_1: R17.1 U1.13
NetR18_2: R18.2 U1.21
NetR19_2: R19.2 U1.22
NetR20_1: R20.1 U1.31
NetR22_1: R22.1 R23.2 U1.14
NetU2_6: U2.6 U2.7
pads on no net: U1.2 U1.3 U1.15 U1.19
copper on no net: | length 4.6
  Top Layer w0.013: -32.491,-19.483 -32.281,-19.483 ; -32.491,-18.206 -32.281,-18.206 ; -32.281,-19.483 ccw(c-32.491,-18.844) -31.852,-19.053 -31.852,-18.635 ccw(c-32.491,-18.844) -32.281,-18.206 ; -32.281,-19.483 -32.7,-19.483 cw(c-32.491,-18.844) -33.129,-19.053 -33.129,-18.635 cw(c-32.491,-18.844) -32.7,-18.206 -32.281,-18.206

## Silkscreen, mask and mechanical layers (free items; w line width, h text height)
Top Overlay:
  lines w0.2: 199.939,27.164 200.009,27.665 199.21,27.665 199.289,27.165 197.988,27.165 ; 199.939,27.165 204.989,27.165 ; 199.939,37.664 200.009,38.165 199.21,38.165 199.289,37.665 197.988,37.665 197.988,27.165 ; 199.939,37.665 204.989,37.665 204.989,27.165 ; 203.839,16.165 204.389,16.165 ; 203.839,26.665 204.389,26.665 ; 203.839,16.165 203.889,16.665 197.988,16.665 197.988,27.165 ; 203.839,26.665 203.889,27.165 197.988,27.165 ; 204.388,16.165 204.339,16.665 204.989,16.665 204.989,27.165 ; 204.388,26.665 204.339,27.165 204.989,27.165 ; 208.468,6.046 224.008,6.046 224.008,3.356 ; 221.318,3.356 221.318,6.046 ; 230.375,27.652 230.925,27.652 ; 230.375,38.152 230.925,38.152 ; 230.376,27.652 230.425,27.152 229.775,27.152 ; 230.376,38.152 230.425,37.652 229.775,37.652 229.775,27.152 ; 230.924,27.652 230.875,27.152 236.775,27.152 ; 230.924,38.152 230.875,37.652 236.775,37.652 236.775,27.152 ; 234.825,16.652 229.775,16.652 229.775,27.152 ; 234.824,16.654 234.755,16.152 235.553,16.152 235.475,16.652 236.775,16.652 236.775,27.152 ; 234.825,27.152 229.775,27.152 ; 234.824,27.154 234.755,26.652 235.553,26.652 235.475,27.152 236.775,27.152 ; 239.941,27.159 240.01,27.661 239.212,27.661 239.29,27.161 237.99,27.161 ; 239.94,27.161 244.99,27.161 ; 239.941,37.659 240.01,38.161 239.212,38.161 239.29,37.661 237.99,37.661 237.99,27.161 ; 239.94,37.661 244.99,37.661 244.99,27.161 ; 243.84,16.161 244.39,16.161 ; 243.84,26.661 244.39,26.661 ; 243.841,16.161 243.89,16.661 237.99,16.661 237.99,27.161 ; 243.841,26.661 243.89,27.161 237.99,27.161 ; 244.389,16.161 244.34,16.661 244.99,16.661 244.99,27.161 ; 244.389,26.661 244.34,27.161 244.99,27.161 ; 248.468,6.046 264.008,6.046 264.008,3.356 ; 261.318,3.356 261.318,6.046 ; 270.375,27.652 270.925,27.652 ; 270.375,38.152 270.925,38.152 ; 270.376,27.652 270.425,27.152 269.775,27.152 ; 270.376,38.152 270.425,37.652 269.775,37.652 269.775,27.152 ; 270.924,27.652 270.875,27.152 276.775,27.152 ; 270.924,38.152 270.875,37.652 276.775,37.652 276.775,27.152 ; 274.825,16.652 269.775,16.652 269.775,27.152 ; 274.824,16.654 274.755,16.152 275.553,16.152 275.475,16.652 276.775,16.652 276.775,27.152 ; 274.825,27.152 269.775,27.152 ; 274.824,27.154 274.755,26.652 275.553,26.652 275.475,27.152 276.775,27.152 ; 209.938,44.814 225.538,44.814 225.538,50.914 209.938,50.914 209.938,44.814
  lines w0.762: 237.909,35.366 cw(c237.902,35.364) 237.909,35.364 ccw(c237.902,35.364) 237.909,35.366
Bottom Overlay:
  lines w0.254: 253.494,41.296 261.241,41.296
Mechanical 1:
  lines w0.013: 209.339,50.624 225.343,50.624 cw(c225.343,39.624) 236.34,39.385 238.343,39.385 cw(c249.345,39.62) 249.347,50.624 ; 209.347,50.624 ccw(c209.343,39.624) 198.343,39.619 198.343,14.624 ccw(c209.343,14.624) 209.356,3.624 225.343,3.624 ccw(c225.343,14.624) 236.343,14.625 238.343,14.625 ; 238.343,14.624 ccw(c249.343,14.624) 249.356,3.624 ; 238.343,36.398 ccw(c237.343,36.385) 236.343,36.385 236.343,17.626 ccw(c237.343,17.625) 238.343,17.625 238.343,36.4 ; 249.339,50.624 265.343,50.624 cw(c265.343,39.624) 276.34,39.385 ; 249.341,50.62 265.345,50.62 ; 276.34,39.866 276.343,14.625 cw(c265.343,14.624) 265.343,3.624 ; 276.343,17.626 276.343,36.385 ; 249.356,3.624 265.343,3.624 ; 249.356,3.624 265.343,3.624

## Dimensions
198.323,39.345 to 236.372,32.639 on Bottom Assembly
209.347,50.618 to 209.356,3.631 on Mechanical 12

## Text inside footprints (layer, text, board x,y; h text height)
J4: Top Overlay "8" at 265.73,6.704 h1.02; Top Overlay "1" at 248.07,6.704 h1.02
P1: Top Overlay "1" at 206.045,4.724 h1.02; Bottom Overlay "8" at 228.016,5.994 h1.02 r180
U1: Top Overlay "*" at 210.966,24.759 h1.27 r45; Mechanical 13 "*" at 212.911,26.165 h1.27 r45